# Altium PCB CH32x203K-R0-1v0.PcbDoc
Units mil, origin at the board's own origin, x right, y up, seen from the top; angles counter-clockwise.
Board outline 1496.06 x 2440.94 mil, 2 copper layers (Top Layer, Bottom Layer); 29 components, 41 nets, 145 pads, 343 vias.
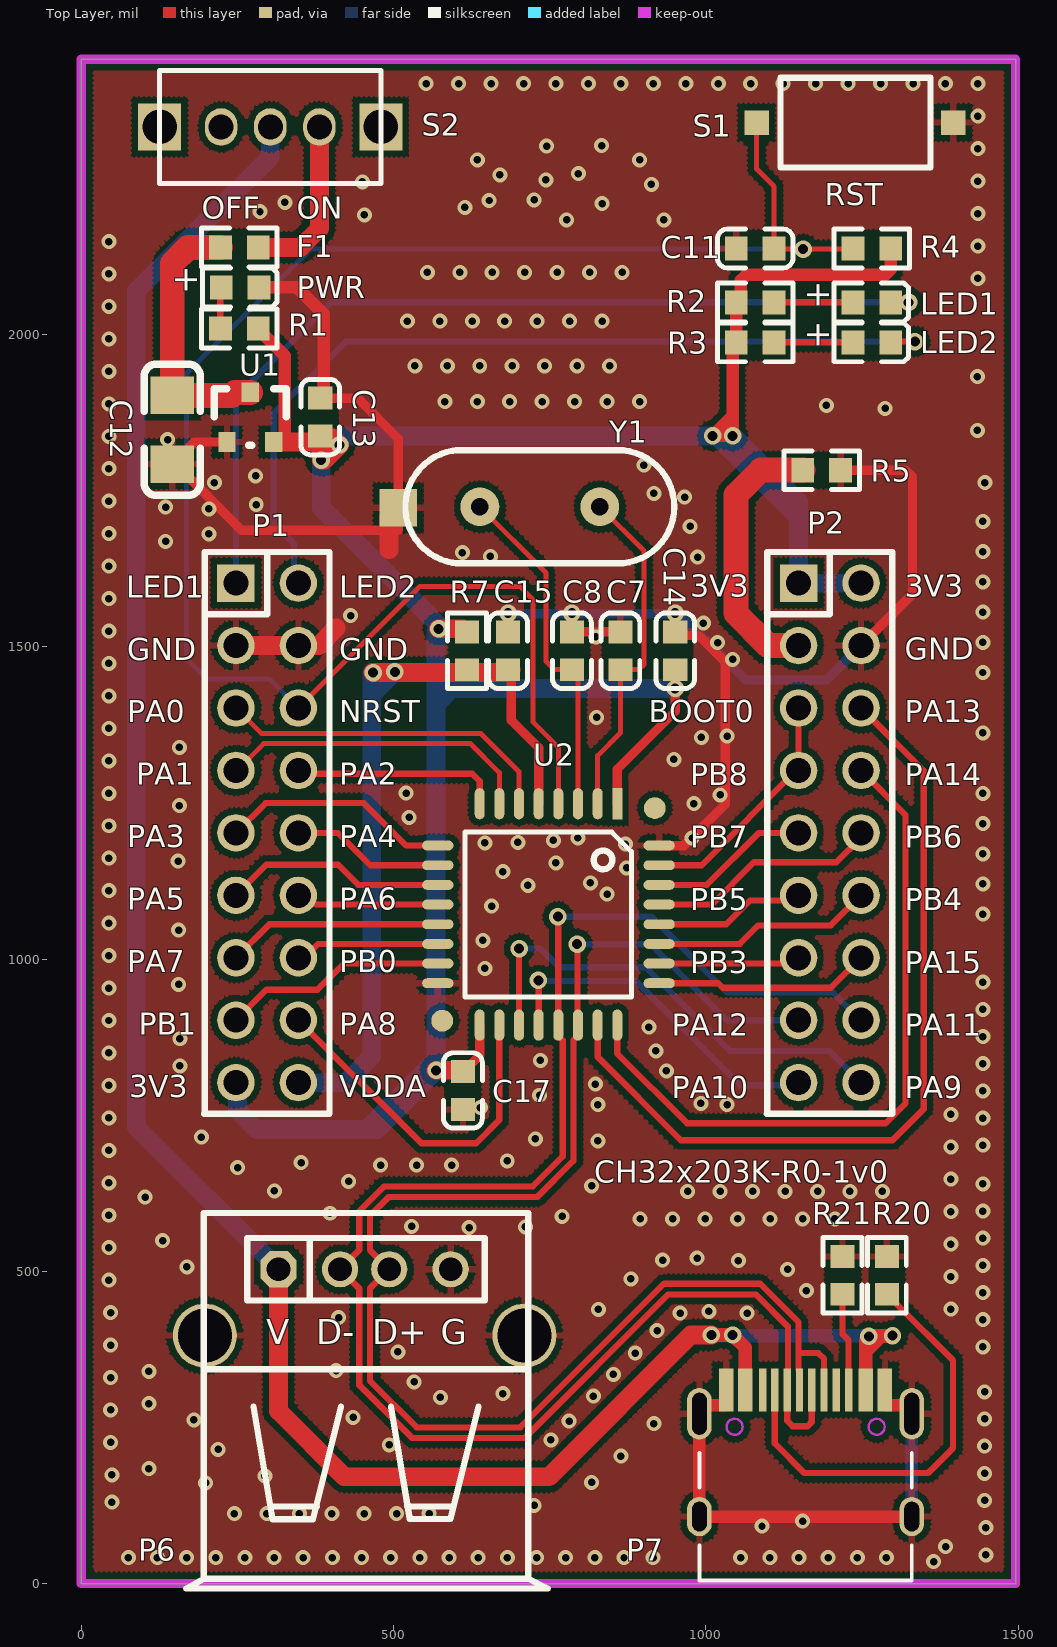
[diagram p0: Top Layer view]
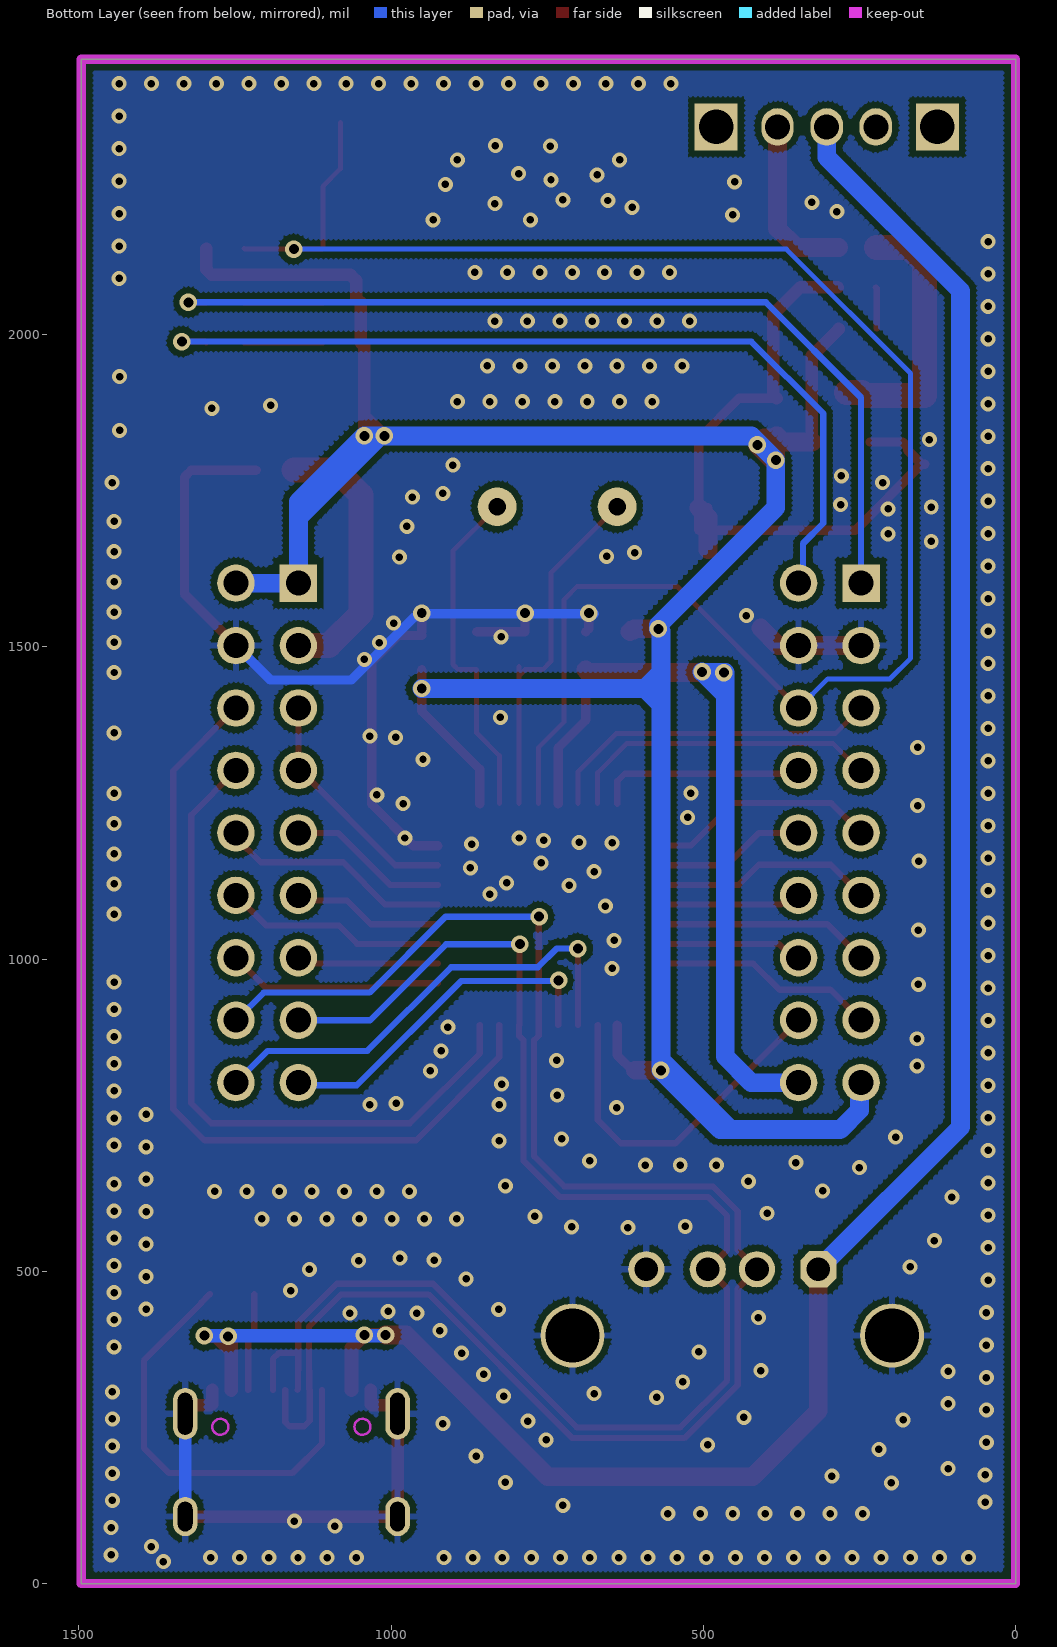
[diagram p1: Bottom Layer view, seen from below]

## Layer stack, top to bottom
Top Solder: solder mask 0.4, Solder Resist, Dk 3.5
Top Layer: signal copper 1.4
Dielectric 1: dielectric 12.6, FR-4, Dk 4.8
Bottom Layer: signal copper 1.4
Bottom Solder: solder mask 0.4, Solder Resist, Dk 3.5

## Board outline
0,0 1496.06,0 1496.06,2440.94 0,2440.94

## Design rules (kind name [scope] priority, off if disabled: settings)
Clearance Clearance_1 [InPolygon] p1: gap=10 ignorepadtopadclearanceinfootprint=FALSE
Clearance [All] p2: gap=6 ignorepadtopadclearanceinfootprint=FALSE
ComponentClearance [All] p1 off: gap=10 collisioncheckmode=3 verticalgap=10 showdistances=FALSE
DiffPairsRouting [All] p1: maxlimit=10 minlimit=7 mostfreqgap=8 toplayer_minwidth=6 toplayer_maxwidth=15 toplayer_prefwidth=8 bottomlayer_minwidth=6 bottomlayer_maxwidth=15 bottomlayer_prefwidth=8 maxuncoupledlength=500
MinimumSolderMaskSliver [All] p1 off: minsoldermaskwidth=10
PolygonConnect PolygonConnect_1 [IsVia] p1: connectstyle=Direct reliefconductorwidth=10 reliefentries=4 polygonreliefangle="90 Angle" airgapwidth=10
PolygonConnect [All] p2: connectstyle=Relief reliefconductorwidth=10 reliefentries=4 polygonreliefangle="90 Angle" airgapwidth=10
RoutingVias [All] p1: holewidth=16 width=28 viastyle="Through Hole" minholewidth=12 minwidth=24 maxholewidth=28 maxwidth=50
SilkToSilkClearance [All] p1 off: silktosilkclearance=10
SilkToSolderMaskClearance [IsPad] p1 off: minsilkscreentomaskgap=10 clearancetoexposedcopper=TRUE
SolderMaskExpansion [All] p1: expansion=4 istentingtop=FALSE
Width [All] p1: maxlimit=100 minlimit=6 preferedwidth=10
25 further rules are at their usual default settings.

## Components (designator, comment, footprint, x,y, rotation, side; value= is the part's Value field where it differs from the comment)
C7 "22pF" 0603_C 863.11,1524.17 r270 top
C8 "22pF" 0603_C 785.55,1524.17 r270 top
C11 "0.1uF" 0603_C 1048.85,2138.1 r0 top
C12 "10uF" 3216_C 145.48,1902.85 r90 top
C13 "2.2uF" 0603_C 382.48,1898.48 r270 top
C14 "0.1uF" 0603_C 951,1524.17 r270 top
C15 "0.1uF" 0603_C 683.43,1463.54 r90 top
C17 "0.1uF" 0603_C 611,820 r270 top
F1 "500mA" 0603 283.11,2139.85 r180 top
LED1 "LED1   blue" 0603+ 1235.48,2051.85 r0 top
LED2 "LED2  blue" 0603+ 1235.48,1987.85 r0 top
P1 "HEADER 9x2" IDC18-2.54MM 247.48,1602.17 r0 top
P2 "HEADER 9x2" IDC18-2.54MM 1148.58,1602.17 r0 top
P6 "USB_A" USBAF 315.77,503.31 r0 top
P7 "TYPE-C" TYPE-C-Receptacle-2.0 1159.82,310 r0 top
PWR "POWER  red" 0603+ 223.86,2075.85 r0 top
R1 "1K" 0603 222.48,2009.85 r0 top
R2 "1K" 0603 1048.85,2051.85 r0 top
R3 "1K" 0603 1048.85,1987.85 r0 top
R4 "NC(10K)" 0603 1235.48,2138.1 r0 top value=10K
R5 "4.7K" 0603 1216,1783 r180 top value=10K
R7 "0Ω" 0603 617.48,1524.17 r270 top
R20 "NC(5.1K)" 0603 1289.96,463.23 r90 top
R21 "NC(5.1K)" 0603 1219.09,463.23 r90 top
S1 "RST" SMD_6.1x3.65x2.5mm-KEY 1081.3,2339.76 r0 top
S2 "SW" KEY2 302.48,2332.85 r0 top
U1 "6219P33M" SOT-23 233.08,1828.32 r0 top
U2 "CH32F203K" LQFP32 858.28,1248.85 r180 top
Y1 "8M" XT_AT49 638.2,1724.54 r270 top

## Footprints (in the part's own frame and the unit in brackets; to place one, negate y for a bottom-side part, rotate by r counter-clockwise, add the part's x,y. Pads: shape width x height; smd on the part's side, far side on the other; paste and mask are expansions set on the pad)
0603 [mm]
  rect 0.93x0.98 smd: 1(0,0) 2(1.54,0)
  silkscreen extent -0.76,-0.79 2.3,0.79
0603+ [mm]
  rect 0.93x0.98 smd: 1(0,0) 2(1.54,0)
  silkscreen extent -0.76,-0.79 2.27,0.79
0603_C [mm]
  rect 0.93x0.98 smd: 1(0,0) 2(1.54,0)
  silkscreen extent -0.76,-0.79 2.31,0.79
3216_C [mil]
  rect 60x70 smd: 1(0,0) 2(-110,0)
  silkscreen extent -160,-45 50,45
IDC18-2.54MM [mil]
  rect 60x60 hole 40: 1(0,0)
  round 60 hole 40: 2(100,0) 3(0,-100) 4(100,-100) 5(0,-200) 6(100,-200) 7(0,-300) 8(100,-300) 9(0,-400) 10(100,-400) 11(0,-500) 12(100,-500) 13(0,-600) 14(100,-600) 15(0,-700) 16(100,-700) 17(0,-800) 18(100,-800)
  silkscreen extent -51,-850 150,50
KEY2 [mm]
  rect 1.75x1.9 hole 1.4: 0(-4.5,0) 0(4.5,0)
  oval 1.321x1.524 hole 1.016: 1(0,0) 2(-2,0) 3(2,0)
  silkscreen extent -4.51,-2.31 4.5,2.29
LQFP32 [mil]
  round 35 smd: 0(-60,7) 0(280.47,347.47)
  rect 16x50 smd: 1(0,0)
  oval 16x50 smd: 2(31.5,0) 3(62.99,0) 4(94.49,0) 5(125.98,0) 6(157.48,0) 7(188.98,0) 8(220.47,0) 17(220.47,354.5) 18(188.98,354.5) 19(157.48,354.5) 20(125.98,354.5) 21(94.49,354.5) 22(62.99,354.5) 23(31.5,354.5) 24(0,354.5)
  oval 50x16 smd: 9(287.5,67) 10(287.5,98.5) 11(287.5,129.99) 12(287.5,161.49) 13(287.5,192.98) 14(287.5,224.48) 15(287.5,255.98) 16(287.5,287.47) 25(-67,287.47) 26(-67,255.98) 27(-67,224.48) 28(-67,192.98) 29(-67,161.49) 30(-67,129.99) 31(-67,98.5) 32(-67,67)
  silkscreen extent -22,45 244,309
SMD_6.1x3.65x2.5mm-KEY [mm]
  rect 1x1 smd: 1(0,0) 2(8,0)
  silkscreen extent 0.98,-1.83 7.08,1.83
SOT-23 [mm]
  rect 0.7x0.8 smd: 1(0,0) 2(1.9,0) 3(0.95,2.02)
  silkscreen extent -0.51,-0.13 2.41,2.16
TYPE-C-Receptacle-2.0 [mm]
  oval 1x1.6 hole 0.6 slot 1.2 at 90 deg: 0(-4.32,-5.15) 0(4.32,-5.15)
  oval 1x2.1 hole 0.6 slot 1.7 at 90 deg: 0(-4.32,-0.97) 0(4.32,-0.97)
  rect 0.6x1.75 smd: A1(-3.225,0) A4(-2.45,0) B1(3.225,0) B4(2.45,0)
  rect 0.3x1.75 smd: A5(-1.25,0) A6(-0.25,0) A7(0.25,0) A8(1.25,0) B5(1.75,0) B6(0.75,0) B7(-0.75,0) B8(-1.75,0)
  Keep-Out Layer circle w0.1: c-2.89,-1.5 r0.325
  Keep-Out Layer circle w0.1: c2.89,-1.5 r0.325
  silkscreen extent -4.32,-7.75 4.32,-2.55
USBAF [mm]
  round 2.6 hole 2.2: 0(-3,-2.7) 0(10,-2.7)
  oct 1.473x1.473 hole 0.965: 1(0,0)
  round 1.473 hole 0.965: 2(2.5,0) 3(4.5,0) 4(7,0)
  silkscreen extent -3.75,-12.99 10.95,2.29
XT_AT49 [mil]
  rect 60x60 smd: 0(1.69,-130.72)
  round 62 hole 28: 1(0,0) 2(0,192.13)
  silkscreen extent -91,-119 91,311

## Part data
C7 C8 C11 C14 C15 C17: library part Cap, "Capacitor", LatestRevisionDate=17-Jul-2002, LatestRevisionNote="Re-released for DXP Platform.", PackageReference=RAD-0.3, Published=8-Jun-2000, Publisher="Altium Limited"
C12 C13: library part CAP, "Capacitor"
F1: library part FUSE1, "Fuse"
LED1 LED2 PWR: library part LED0, "Typical INFRARED GaAs LED", LatestRevisionDate=08-Jul-2005, LatestRevisionNote="Mech Layer 1 removed.", PackageReference=LED-0, Published=8-Jun-2000, Publisher="Altium Limited"
P1 P2: "Header, 9-Pin, Dual row"
P6: library part USB, "USB Port"
P7: library part TYPE-C1
R1 R2 R3: library part "Res Semi", "Semiconductor Resistor", LatestRevisionDate=17-Jul-2002, LatestRevisionNote="Re-released for DXP Platform.", PackageReference=AXIAL-0.5, Published=8-Jun-2000, Publisher="Altium Limited"
R4 R5 R7 R20 R21: library part Res2, "Resistor"
  R4 R5 R7: LatestRevisionDate=17-Jul-2002, LatestRevisionNote="Re-released for DXP Platform.", PackageReference=AXIAL-0.4, Published=8-Jun-2000, Publisher="Altium Limited"
S1: library part KEY
U2: "ARM M3 LMD-MCU, 144MHz, USB FS, CAN"
Y1: library part XTAL, "Crystal Oscillator", LatestRevisionDate=17-Jul-2002, LatestRevisionNote="Re-released for DXP Platform.", PackageReference=R38, Published=8-Jun-2000, Publisher="Altium Limited"

## Via types
v1: diameter 24, hole 12, Top Layer to Bottom Layer, tented both sides, 320 vias
v2: diameter 28, hole 16, Top Layer to Bottom Layer, tented both sides, 23 vias

## Nets (pads, with @x,y where several pads share a name; then routed paths per layer and width w, separated by ;. In a path a pad name is that pad's centre, name@x,y a point inside that pad or via, vN(x,y) a via of type N, cw(c..) or ccw(c..) an arc to the next point about the centre after c; other vN are vias at no path point)
+5V: P6.1 P7.A4 P7.B4 S2.1 | length 3656.1
  Top Layer w22: v2(1008.93,398) v2(1043,398) 1063.36,377.64 P7.A4 ; P7.B4 1256.28,371.96 ; v2(1261,396) v2@1261,394.38 ; v2(1299,397) 1298.5,396.5 1280.81,396.5 ; 1256.28,371.96 1256.28,389.65 v2@1261,394.38 ; 1256.28,371.96 1280.81,396.5 ; v2@1261,394.38 1263.12,396.5 1280.81,396.5
  Top Layer w30: P6.1 315.77,276.23 421,171 749,171 976,398 v2(1008.93,398)
  Bottom Layer w22: v2(1008.93,398) 1009.93,397 v2@1044,397 ; v2(1043,398) v2@1044,397 ; v2(1261,396) v2@1260,397 ; v2(1299,397) v2@1260,397 ; v2@1044,397 v2@1260,397
  Bottom Layer w30: S2.1 302.48,2284.48 88,2070 88,731.08 P6.1
BOOT0: P2.5 P2.7 U2.31 | length 386.2
  Top Layer w10: U2.31 993.35,1150.35 1145.17,1302.17 P2.7 P2.5
GND: C7.1 C8.1 C11.1 C12.2 C13.1 C14.1 C15.2 C17.2 P1.3 P1.4 P2.4 P6.0 P6.4 P7.0 P7.A1 P7.B1 PWR.2 R5.1 R20.2 R21.2 S1.2 U1.1 U2.16 U2.32 Y1.0 | length 3812.4
  Top Layer w15: C12.2 C12.2@150.48,1792.85 ; U1.1 180.95,1828.32 172.98,1820.35 172.98,1815.35 C12.2@150.48,1792.85 ; C13.1 442.52,1898.48 507.48,1833.52 507.48,1686.85 ; 492.48,1686.85 256.48,1686.85 C12.2@150.48,1792.85 ; Y1.0@492.48,1722.85 Y1.0 ; v2(683.43,1554.29) 683.43,1529.17 C15.2@688.43,1524.17 ; v2(785.55,1554.29) C8.1 C7.1 ; U2.32 964.85,1181.85 1031,1248 1031,1476 988.71,1518.29 C14.1@951,1518.29 ; C14.1 v2(951,1554.29) ; R5.1 1320,1783 1331,1772 1331,1584.59 P2.4
  Top Layer w20: PWR.2 345.15,2075.85 388,2033 388,1904 C13.1 ; P7.A1 1032.85,287.36 1031.04,285.55 998.69,285.55 989.74,276.6 989.74,271.81 989.74,107.24 P7.0@1329.9,107.24 ; P7.B1 1286.79,287.36 1288.6,285.55 1320.95,285.55 1329.9,276.6 P7.0@1329.9,271.81
  Top Layer w30: P1.3 P1.4 379.96,1502.17 408.15,1530.36 ; 492.48,1655.48 492.48,1707.85 Y1.0
  Bottom Layer w15: v2@674.59,1553.41 784.67,1553.41 v2(785.55,1554.29) ; v2@785.55,1553.41 v2@941.59,1553.41 ; v2(951,1554.29) 954.52,1554.29 960.92,1547.89 963.11,1547.89 1064,1447 1193.41,1447 P2.4
  Bottom Layer w20: P7.0@1329.9,107.24 P7.0@1329.9,271.81
  other v1: 1365,35 75.02,41.6 121.72,41.6 168.42,41.6 215.13,41.6 261.83,41.6 308.53,41.6 355.24,41.6 401.94,41.6 448.64,41.6 495.35,41.6 542.05,41.6 588.76,41.6 635.46,41.6 682.16,41.6 728.87,41.6 775.57,41.6 822.27,41.6 868.98,41.6 915.68,41.6 1055.79,41.6 1102.5,41.6 1149.2,41.6 1195.9,41.6 1242.61,41.6 1289.31,41.6 1448.6,45.98 1384,59 1448.6,89.48 1090,92 1155,100 244.98,112 296.97,112 348.95,112 400.94,112 452.92,112 504.9,112 556.89,112 725,125 48.88,130.43 1446.6,132.98 199,161 817,162 294,172 48.88,173.93 1446.6,176.48 108,183.97 864,204 219,215 1446.6,219.98 493,222 46.88,225.92 752,230 917,256 781,260 180,262 1446.6,263.48 435,266 46.88,277.9 108,287.94 575,298 820,300 675,304 1446.6,306.98 533,323 46.88,329.88 852,335 108,339.92 408,341 887,369 507,371 1443.6,378.98 46.88,381.87 922,405 1443.6,422.48 412,426 959,433 1066,433 46.88,433.85 1005,436 828,439 1392.48,439.56 1443.6,465.98 1161,469 43.88,485.83 880,488 1392.48,491.55 1131,503 169,507 1443.6,509.48 1052,517 931,518 986,521 43.88,537.82 1392.48,543.53 130,549 1443.6,552.98 621,570 711,571 529,572 894.98,584 946.97,584 998.95,584 1050.94,584 1102.92,584 1154.9,584 1206.89,584 770,588 43.88,589.8 398,593 1392.48,595.51 1443.6,596.48 102,619 970.98,628 1022.97,628 1074.95,628 1126.94,628 1178.92,628 1230.9,628 1282.89,628 309,629 817,637 1443.6,639.98 43.88,641.79 428,644 1392.48,647.5 250,666 479,670 537,670 593,670 352,674 682,677 43.88,693.77 1392.48,699.48 1443.6,701.98 827,709 727,712 192,715 43.88,745.75 1443.6,745.48 1392.48,751.47 639,762 827,767 1034,767 992,769 734,782 1443.6,788.98 43.88,797.74 823,800 937,821 157.6,828.98 1443.6,832.48 735,838 43.88,849.72 920,853 157.6,872.48 1443.6,875.98 909,891 43.88,901.71 1443.6,919.48 43.88,953.69 155.6,959.48 1443.6,962.98 646,985 43.88,1005.67 643,1030 155.6,1046.48 43.88,1057.66 1443.6,1071.98 657,1085 842,1104 43.88,1109.64 715,1118 1443.6,1120.37 815,1122 675,1140 873,1146 760,1154 155,1157 43.88,1161.62 1443.6,1168.75 871,1184 646,1186 699,1187 756,1190 795,1194 978,1194 43.88,1213.61 1443.6,1217.14 525,1227 157,1246 981,1249 1023,1263 43.88,1265.59 520,1266 1443.6,1265.52 43.88,1317.58 949,1320 157,1339 993,1355 1034,1357 1443.6,1362.29 43.88,1369.56 825,1387 43.88,1421.54 1443.6,1459.06 43.88,1473.53 1043,1480 1019,1507 1443.6,1507.45 824,1516 43.88,1525.51 996,1538 431,1550 1443.6,1555.83 43.88,1577.49 1443.6,1604.21 43.88,1629.48 987,1644 655,1645 610,1651 1443.6,1652.6 135,1669 204,1681 43.88,1681.46 975,1693 1443.6,1700.98 204,1721 135,1724 280,1728 43.88,1733.45 966,1740 917,1746 213,1763 1447,1763 279,1774 43.88,1785.43 901,1791 138,1832 43.88,1837.41 1435,1847 1287,1882 1193,1887 43.88,1889.4 581.98,1893 633.97,1893 685.95,1893 737.94,1893 789.92,1893 841.9,1893 893.89,1893 1435,1933 43.88,1941.38 533.98,1950 585.97,1950 637.95,1950 689.94,1950 741.92,1950 793.9,1950 845.89,1950 43.88,1993.36 521.98,2022 573.97,2022 625.95,2022 677.94,2022 729.92,2022 781.9,2022 833.89,2022 43.88,2045.35 1435.84,2090.1 43.88,2097.33 553.98,2100 605.97,2100 657.95,2100 709.94,2100 761.92,2100 813.9,2100 865.89,2100 1435.84,2142.08 43.88,2149.32 776.94,2184 932.89,2184 453,2192 1435.84,2194.06 286,2197 614,2204 834,2210 326,2212 653,2215 725,2216 913,2241 450,2245 1435.84,2246.05 744,2248 670,2256 796,2258 633.98,2280 893.9,2280 1435.84,2298.03 745,2302 833,2303 1435.84,2350.02 552.11,2402 604.1,2402 656.08,2402 708.06,2402 760.05,2402 812.03,2402 864.02,2402 916,2402 967.98,2402 1019.97,2402 1071.95,2402 1123.94,2402 1175.92,2402 1227.9,2402 1279.89,2402 1331.87,2402 1383.85,2402 1435.84,2402
LED1: LED1.2 P1.1 | length 1466.5
  Top Layer w10: LED1.2 v2(1324.85,2051.85)
  Bottom Layer w10: P1.1 247.48,1899.48 399.85,2051.85 v2(1324.85,2051.85)
LED2: LED2.2 P1.2 | length 1402.2
  Top Layer w10: LED2.2 1297.26,1989 v2(1335,1989)
  Bottom Layer w10: P1.2 340.37,1609.28 340.37,1665.63 308,1698 308,1874 423,1989 v2(1335,1989)
NetC12_1: C12.1 F1.2 U1.3 | length 426.2
  Top Layer w40: F1.2 170.85,2139.85 145.48,2114.48 C12.1 240.85,1902.85 245.85,1907.85 U1.3
NetF1_1: F1.1 S2.3 | length 273.3
  Top Layer w30: F1.1 350.85,2139.85 381.22,2170.22 S2.3
NetLED1_1: LED1.1 R2.2 | length 126
  Top Layer w10: R2.2 LED1.1
NetLED2_1: LED2.1 R3.2 | length 126
  Top Layer w10: R3.2 LED2.1
NetP2_3: P2.3 R5.2 | length 435
  Top Layer w40: P2.3 1099.83,1502.17 1048,1554 1048,1743 1088,1783 R5.2
NetP7_A5: P7.A5 R20.1 | length 697.9
  Top Layer w10: P7.A5 1110.61,224.39 1158,177 1356,177 1396,217 1396,357.19 1304.25,448.94 1304.25,449.92 1290.95,463.23 R20.1
NetP7_B5: P7.B5 R21.1 | length 157.2
  Top Layer w10: R21.1 1219.09,399.04 1228.72,389.42 P7.B5
NetPWR_1: PWR.1 R1.1 | length 66.6
  Top Layer w10: R1.1 222.48,2074.47 PWR.1
NRST: C11.2 P1.6 R4.1 S1.1 U2.4 | length 2888.2
  Top Layer w8: P1.6 542.31,1597 702,1597 723,1576 723,1380 763.79,1339.21 U2.4 ; S1.1 1081.3,2265.7 1109.48,2237.52 C11.2 1110.58,2137 v2(1156,2137) 1234.38,2137 R4.1
  Bottom Layer w8: P1.6 300.65,1449 201,1449 168,1482 168,1938 367,2137 v2(1156,2137)
PA0: P1.5 U2.6 | length 546.9
  Top Layer w8: P1.5 288.65,1361 640,1361 700.8,1300.2 U2.6
PA1: P1.7 U2.7 | length 508.6
  Top Layer w8: P1.7@249.17,1302.17 292,1345 623,1345 669.3,1298.69 U2.7
  Top Layer w10: P1.7 P1.7@249.17,1302.17
PA2: P1.8 U2.8 | length 333.7
  Top Layer w10: P1.8 352.65,1297 626,1297 637.81,1285.19 U2.8
PA3: P1.9 U2.9 | length 371.3
  Top Layer w10: P1.9 295.31,1250 452,1250 520.15,1181.85 U2.9
PA4: P1.10 U2.10 | length 244.8
  Top Layer w10: P1.10 410.83,1202.17 462.65,1150.35 U2.10
PA5: P1.11 U2.11 | length 357
  Top Layer w8: P1.11 P1.11@247.48,1102.48
  Top Layer w10: P1.11@247.48,1102.48 296,1151 411,1151 443.14,1118.86 U2.11
PA6: P1.12 U2.12 | length 229.4
  Top Layer w10: P1.12 361.01,1102.17 375.82,1087.36 U2.12
PA7: P1.13 U2.13 | length 345.5
  Top Layer w10: P1.13 301.17,1055.87 U2.13
PA8: P1.16 U2.18 | length 571
  Top Layer w10: P1.16 544.65,705 632,705 669.3,742.31 U2.18
PA9: P2.18 U2.19 | length 759.3
  Top Layer w10: U2.19 700.8,1016.8 v2(701,1017)
  Bottom Layer w10: v2(701,1017) 735,1017 765,987 904,987 1038,853 1197.76,853 P2.18
PA10: P2.17 U2.20 | length 559.9
  Top Layer w10: v2(731.98,966.15) 732.3,965.83 U2.20
  Bottom Layer w10: v2(731.98,966.15) 733.13,965 888,965 1055,798 1144.41,798 P2.17
PA11: P2.16 P6.2 P7.A7 P7.B7 U2.21 | length 2694.4
  Top Layer w10: v2(763,1068) 763.79,1067.21 U2.21 763.79,877.21 771.04,869.96 771.04,684.04 723,636 485,636 445.07,596.07 445.07,534.18 P6.2 445.07,472.44 445.07,317.96 530.03,233 710,233 940,463 1080,463 1131.63,411.37 1131.63,369.05 1131.63,341.7 1131.2,341.26 1131.2,310.91 P7.B7 1130.29,260.71 1139,252 1163,252 1169.66,258.66 P7.A7
  Bottom Layer w10: v2(763,1068) 913,1068 1034.63,946.37 1204.39,946.37 P2.16
PA12: P2.15 P6.3 P7.A6 P7.B6 U2.22 | length 2449.2
  Top Layer w10: v2(794,1024) 794.64,1023.36 794.64,895 U2.22 795.29,877.21 788.04,869.96 788.04,677 730.04,619 492.04,619 462.07,589.03 462.07,534.18 P6.3 462.07,472.44 462.07,325 537.07,250 702.96,250 932.96,480 1087.04,480 1148.63,418.41 1148.63,380 1148.63,369.05 ; P7.A6 1149.07,310.91 1149.07,341.26 1148.63,341.7 1148.63,355.37 1148.63,369.05 ; P7.B6 1189.35,359.65 1179.95,369.05 1162.31,369.05 1159.58,369.05 1148.63,369.05
  Bottom Layer w10: v2(794,1024) 912,1024 1033.83,902.17 P2.15
PA13: P2.6 U2.23 | length 1333
  Top Layer w10: U2.23 826.79,843.21 960,710 1299,710 1349,760 1349,1301.76 P2.6
PA14: P2.8 U2.24 | length 1129.6
  Top Layer w10: U2.24 858.28,848.72 970,737 1288,737 1320,769 1320,1230.76 P2.8
PA15: P2.14 U2.25 | length 346.3
  Top Layer w10: U2.25 1019.62,961.38 1027,954 1200.41,954 P2.14
PB0: P1.14 U2.14 | length 232.5
  Top Layer w8: P1.14 P1.14@356.83,1002.17
  Top Layer w10: P1.14@356.83,1002.17 379.02,1024.37 U2.14
PB1: P1.15 U2.15 | length 360.9
  Top Layer w10: P1.15 296.31,951 378,951 419.87,992.87 U2.15
PB3: P2.13 U2.26 | length 227.2
  Top Layer w10: U2.26 1031.87,992.87 1032,993 1139.41,993 P2.13
PB4: P2.12 U2.27 | length 355.5
  Top Layer w10: U2.27 1054.37,1024.37 1084,1054 1200.41,1054 P2.12
PB5: P2.11 U2.28 | length 242.5
  Top Layer w10: U2.28 1032.87,1055.87 1071,1094 1140.41,1094 P2.11
PB6: P2.10 U2.29 | length 375.3
  Top Layer w10: U2.29 1009.36,1087.36 1077,1155 1209,1155 1248.58,1194.58 P2.10
PB7: P2.9 U2.30 | length 257.8
  Top Layer w10: U2.30 1001.86,1118.86 1085.17,1202.17 P2.9
PD0: C7.2 U2.2 Y1.2 | length 552.9
  Top Layer w8: U2.2 826.79,1325.79 863.11,1362.11 C7.2 892.54,1463.54 901,1472 901,1653.87 Y1.2
PD1: C8.2 U2.3 Y1.1 | length 572.4
  Top Layer w8: Y1.1 744,1618.75 744,1477 757.46,1463.54 C8.2 C8.2@795.29,1453.81 ; U2.3 C8.2@795.29,1453.81 ; C8.2@795.29,1469 C8.2@795.29,1453.81
VCC: C13.2 C14.2 C17.1 P1.17 P2.1 P2.2 R1.2 R2.1 R3.1 R4.2 R7.1 U1.2 U2.1 U2.17 | length 4847.3
  Top Layer w15: C17.1@609,822 613.98,822 637.81,845.82 U2.17 ; U2.1 858.28,1304.28 951,1397 v2(951,1433.43) C14.2
  Top Layer w20: R1.2 283.11,2008.87 326,1965.98 326,1828.32 ; 1043,1950 1043,1870 ; R4.2 1296.11,2104.79 1287.32,2096 1065.08,2096 1056.29,2087.21 1056.29,2059.29 R2.1 R3.1 1043,1982 1043,1870 ; 1043,1870 v2(1011,1838) v2(1043,1838) 1043,1870
  Top Layer w30: 326,1828.32 371.97,1828.32 381.5,1837.85 C13.2 ; v2(568,822) C17.1@609,822 ; v2(572,1529) 610.65,1529 613.65,1526 614.65,1527 R7.1 ; C13.2 C13.2@384,1836.33 ; C13.2 383.46,1837.85 C13.2@386.77,1834.54 ; C13.2@384,1836.33 385.79,1834.54 C13.2@386.77,1834.54 ; C13.2@384,1836.33 v2(384,1799) 389.1,1799 v2(413.58,1823.48) ; C13.2@386.77,1834.54 402.52,1834.54 v2(413.58,1823.48) ; C13.2@386.77,1834.54 397.83,1823.48 v2(413.58,1823.48)
  Bottom Layer w30: P1.17 250,799.65 250,758 281,727 456,727 ; v2@559.5,830.5 464.5,735.5 456,727 ; v2(951,1433.43) 593.57,1433.43 ; P2.2 P2.1 1148.58,1706.42 ; 456,727 473,727 v2(568,822) 568,839 568,1407.85 ; 568,1407.85 568,1433.43 ; 568,1407.85 593.57,1433.43 ; 568,1433.43 593.57,1433.43 ; 568,1433.43 568,1459 ; 568,1459 568,1525 v2(572,1529) 572,1535 568,1539 384,1723 v2(384,1799) 411.03,1826.03 423,1838 v2(1011,1838) v2@1017,1838 ; 568,1459 593.57,1433.43 ; v2@1017,1838 v2(1043,1838) 1148.58,1732.42 1148.58,1706.42 ; v2@1017,1838 1148.58,1706.42
VDDA: C15.1 P1.18 R7.2 U2.5 | length 1289.3
  Top Layer w15: C15.1@688.43,1463.54 688.43,1382.57 732.3,1338.7 U2.5
  Top Layer w30: v2(467,1459) 683.88,1459 C15.1@688.43,1463.54
  Bottom Layer w30: P1.18 423.17,802.17 465,844 465,1423 ; v2@465,1459 465,1423 ; v2(467,1459) v2@498,1459 ; v2(502,1460) 465,1423
pads on no net: P7.A8 P7.B8 S2.0 S2.2 U2.0

## Polygon pours and split planes (outlines as drawn)
GND on Bottom Layer "GND" (hatched 90Degree grid 8 track 8, remove dead copper, pour order 1): 0,2440.94 0,0 1496.06,0 1496.06,2442.06 1503,2449
GND on Top Layer "GND" (hatched 90Degree grid 8 track 8, remove dead copper, pour order 0): 0,2440.94 0,0 1496.06,0 1496.06,2440.94

## Keep-outs
Keep-Out Layer:
  the board outline again, w15

## Silkscreen, mask and mechanical layers (free items; w line width, h text height)
Top Overlay:
  text "OFF" at 192.48,2185.85 h35
  text "ON" at 344.48,2185.85 h35
  text "3V3" at 974.93,1580 h35
  text "3V3" at 1319,1580 h35
  text "LED1" at 71.5,1579 h35
  text "LED2" at 412.68,1579 h35
  text "GND" at 1319,1479.63 h35
  text "GND" at 73,1479 h35
  text "GND" at 412.68,1479 h35
  text "PA0" at 73,1379 h35
  text "NRST" at 412.68,1379 h35
  text "BOOT0" at 908.95,1379.25 h35
  text "PA13" at 1319,1379.25 h35
  text "PA1" at 88,1279 h35
  text "PA2" at 412.68,1279 h35
  text "PB8" at 974.93,1278.88 h35
  text "PA14" at 1319,1278.88 h35
  text "PA3" at 73,1179 h35
  text "PA4" at 412.68,1179 h35
  text "PB7" at 974.93,1178.5 h35
  text "PB6" at 1319,1178.5 h35
  text "PA5" at 73,1079 h35
  text "PA6" at 412.68,1079 h35
  text "PB5" at 974.93,1078.13 h35
  text "PB4" at 1319,1078.13 h35
  text "PA7" at 73,979 h35
  text "PB0" at 412.68,979 h35
  text "PB3" at 974.93,977.75 h35
  text "PA15" at 1319,977.75 h35
  text "PB1" at 91.66,879 h35
  text "PA8" at 412.68,879 h35
  text "PA12" at 945.6,877.38 h35
  text "PA11" at 1319,877.38 h35
  text "3V3" at 76.67,779 h35
  text "VDDA" at 412.68,779 h35
  text "PA10" at 945.6,777 h35
  text "PA9" at 1319,777 h35
  text "CH32x203K-R0-1v0" at 821,642 h35
Mechanical 1:
  the board outline again, w10

## Text inside footprints (layer, text, board x,y; h text height)
LED1: Top Overlay "+" at 1197.4,2040.86 h40 r90
LED2: Top Overlay "+" at 1197.4,1976.86 h40 r90
P6: Top Overlay "G" at 575.77,383.31 h40; Top Overlay "V" at 295.77,383.31 h40; Top Overlay "D+" at 465.77,383.31 h40; Top Overlay "D-" at 375.77,383.31 h40
PWR: Top Overlay "+" at 185.78,2064.86 h40 r90